# Altium PCB GPS_LoRa_Tracker.PcbDoc
Units mm, origin at the board's own origin, x right, y up, seen from the top; angles counter-clockwise.
Board outline 61.59 x 53.34 mm, 2 copper layers (Top Layer, Bottom Layer), stack 1.671 mm thick; 3 components, 4 nets, 35 pads, 0 vias.
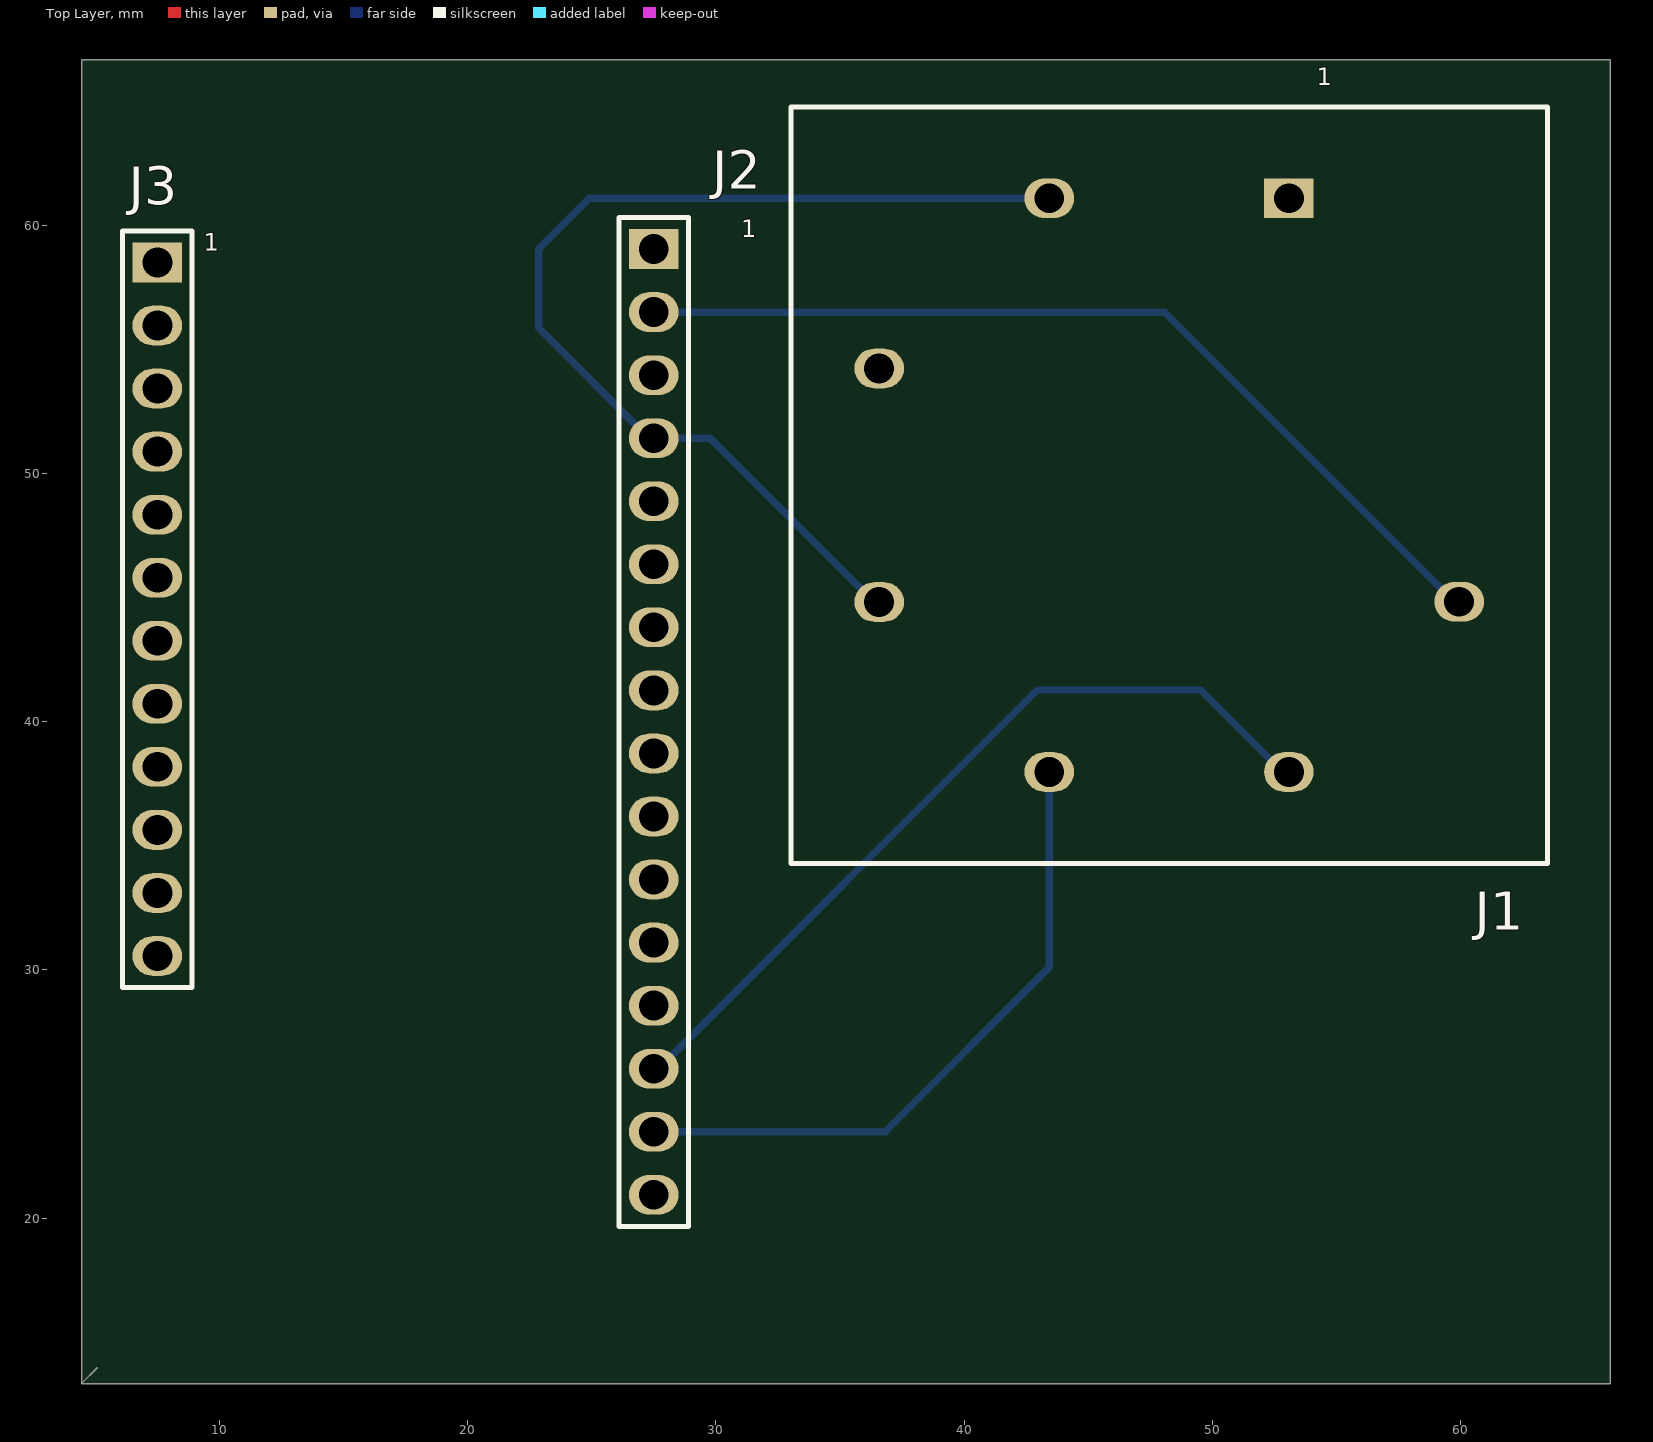
[diagram p0: Top Layer view]
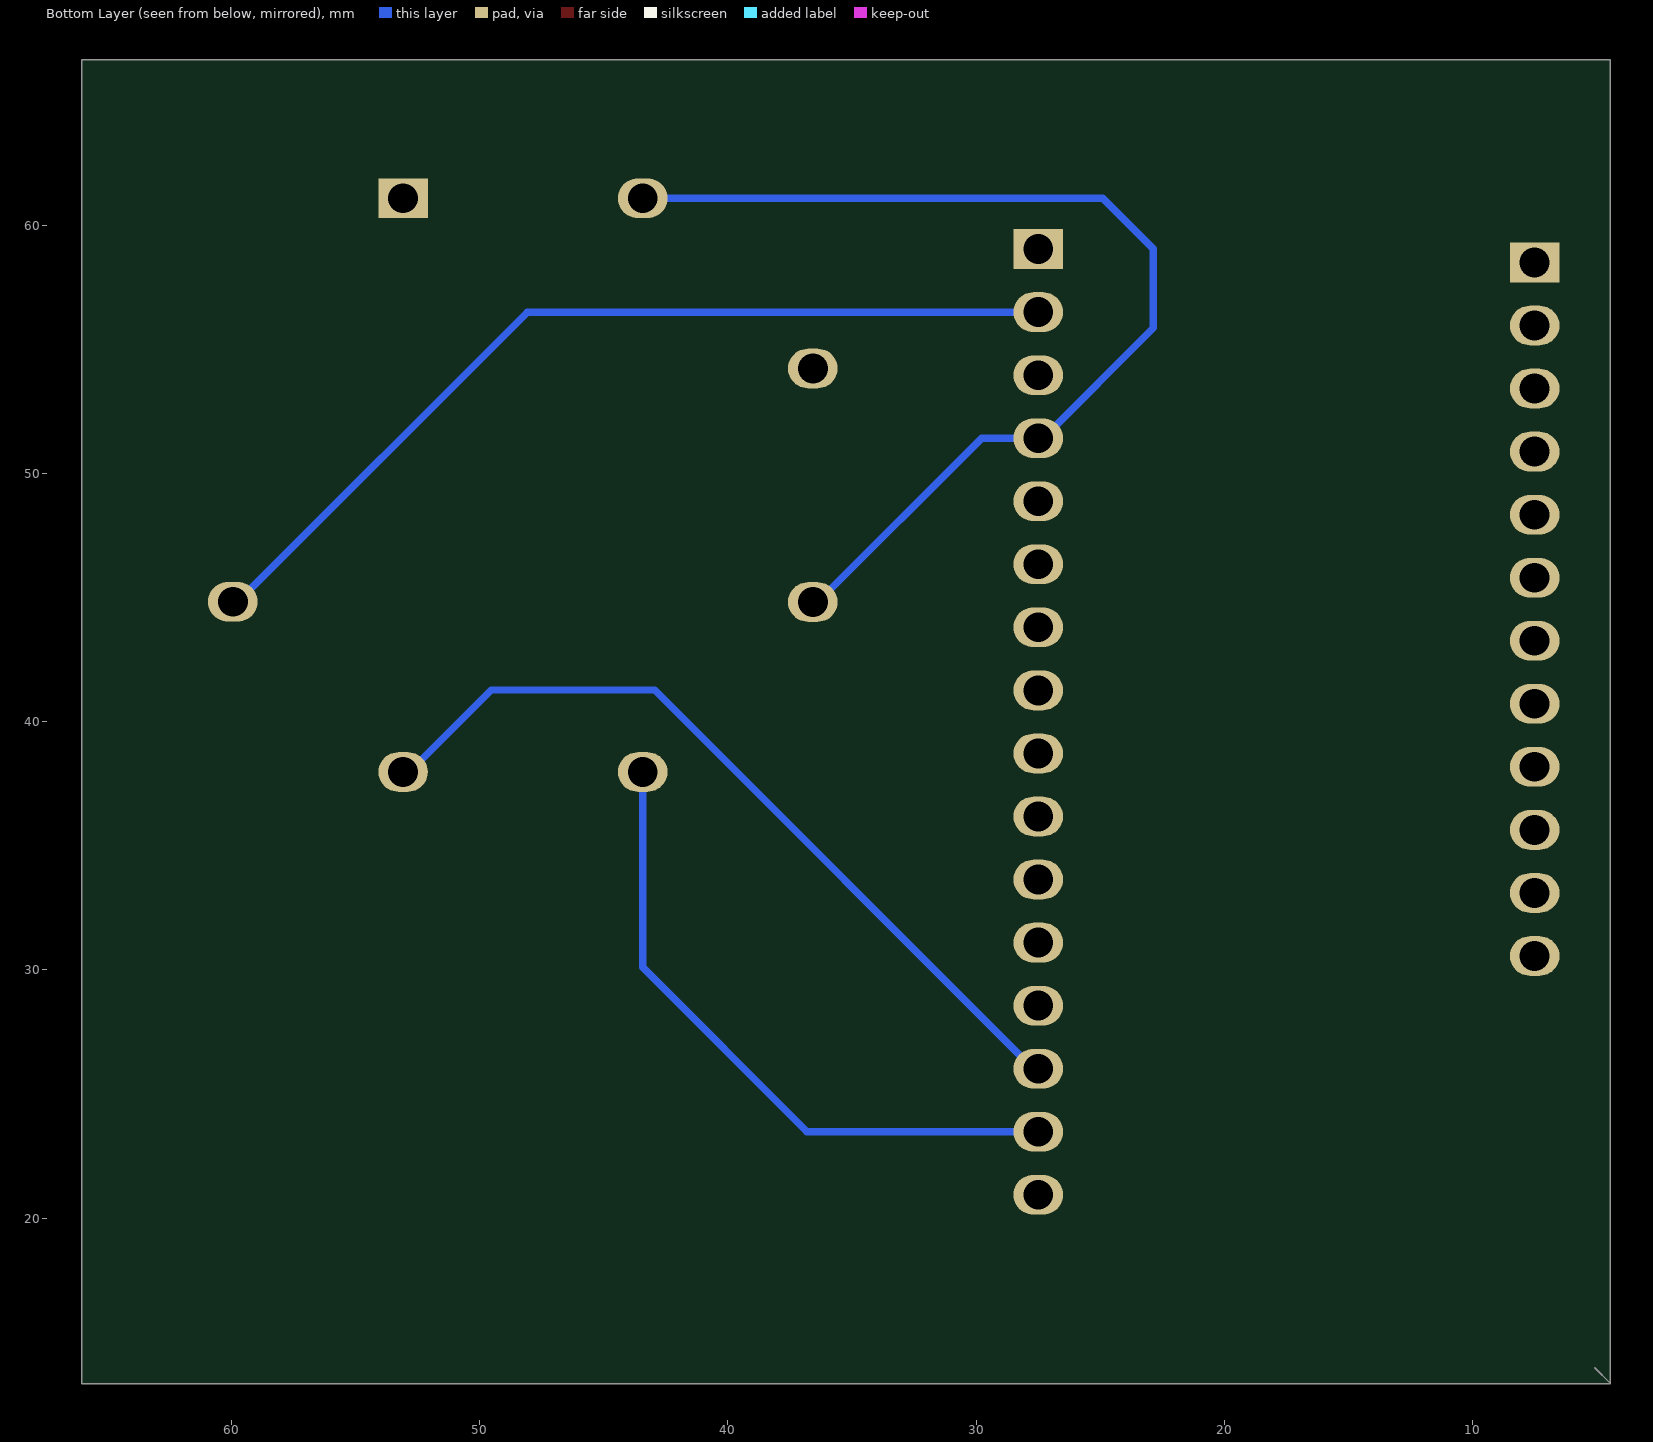
[diagram p1: Bottom Layer view, seen from below]
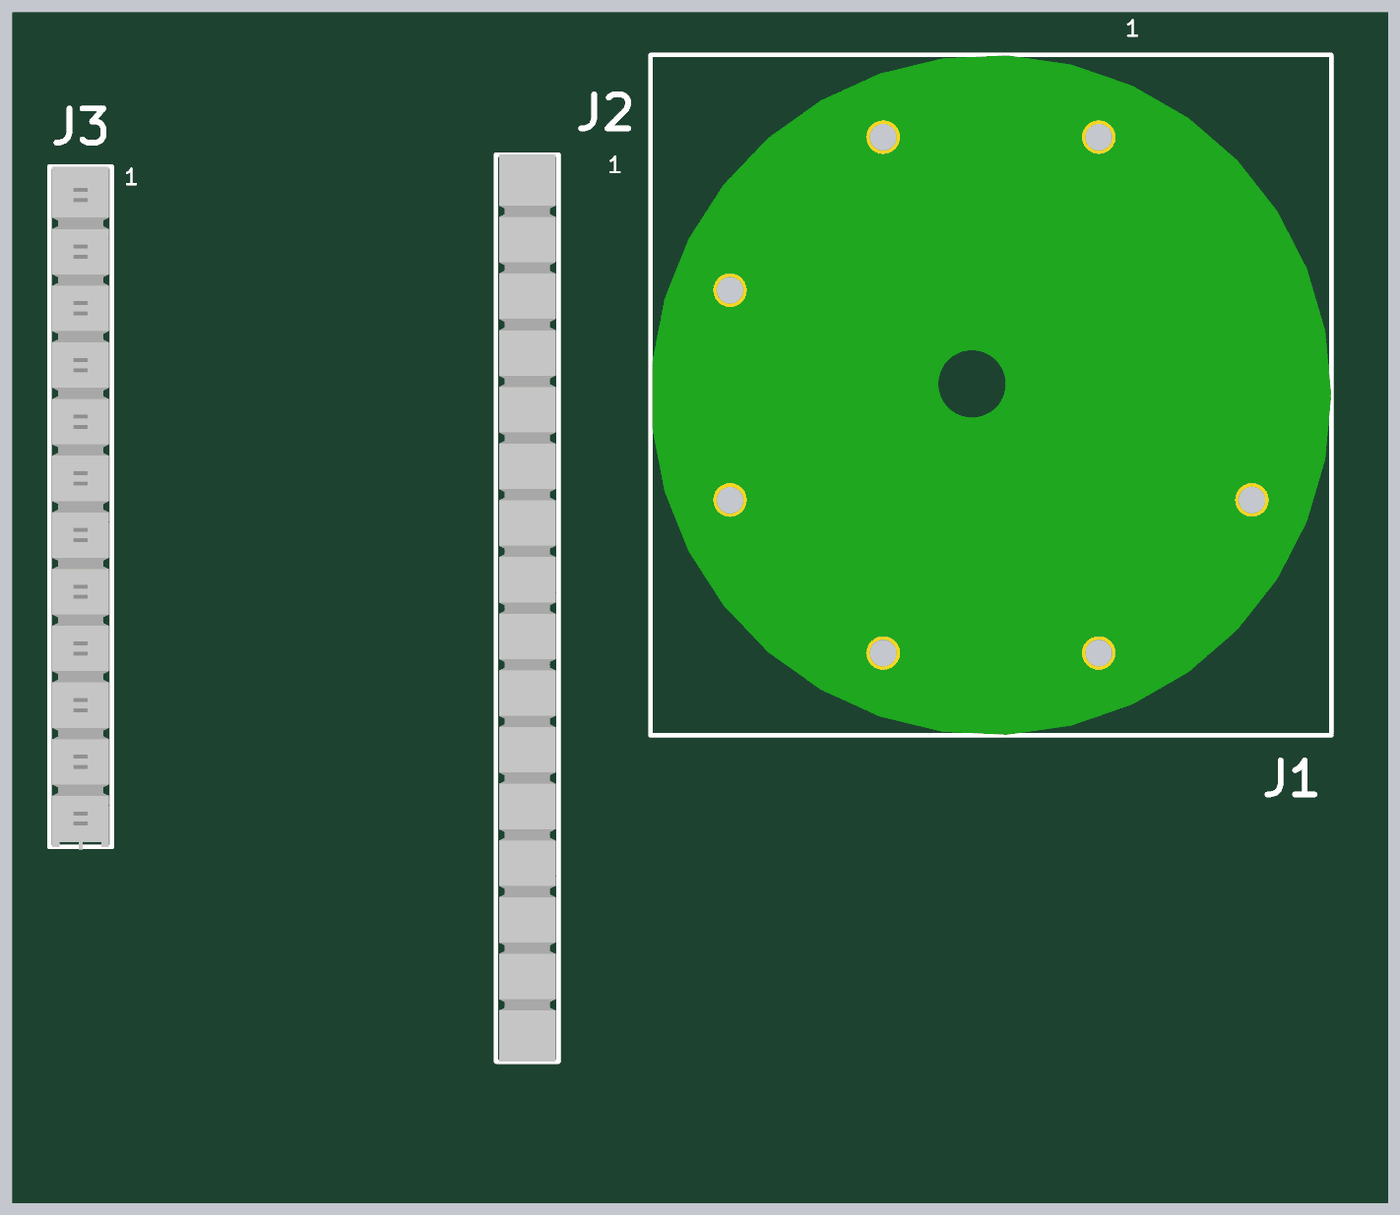
[diagram p2: 3D render of the assembled board from above, using the file's embedded part models]

## Layer stack, top to bottom
Top Solder: solder mask 0.0102, Solder Resist, Dk 3.5
Top Layer: signal copper 0.0356
Dielectric 1: dielectric 1.6, FR-4, Dk 4.8
Bottom Layer: signal copper 0.0356
Bottom Solder: solder mask 0.0102, Solder Resist, Dk 3.5

## Board outline
66.04,66.675 66.04,13.335 4.445,13.335 5.08,13.97 4.445,13.335 4.445,66.675

## Design rules (kind name [scope] priority, off if disabled: settings)
Clearance [OnLayer('Bottom Layer') vs OnLayer('Bottom Layer')] p1: gap=0.3 ignorepadtopadclearanceinfootprint=TRUE
ComponentClearance [All] p1: gap=0.254 collisioncheckmode=3 verticalgap=0 showdistances=FALSE
PolygonConnect [All] p1: connectstyle=Relief reliefconductorwidth=0.254 reliefentries=4 polygonreliefangle="90 Angle" airgapwidth=0.254
RoutingVias [All] p1: holewidth=0.711 width=1.27 viastyle="Through Hole" minholewidth=0.711 minwidth=1.27 maxholewidth=0.711 maxwidth=1.27
SolderMaskExpansion [All] p1: expansion=0.102 istentingtop=FALSE
Width [All] p1: maxlimit=1 minlimit=0.1 preferedwidth=0.3
29 further rules are at their usual default settings.

## Classes and differential pairs
component class GPS_LoRa_Tracker: J2 J3

## Components (designator, comment, footprint, x,y, rotation, side; value= is the part's Value field where it differs from the comment)
J1 "Flora_Header" "FLORA_HEADER - duplicate" 48.26,49.53 r0 top
J2 "1x16 Header" HDR1x16 27.5,39.99 r0 top locked
J3 "1x12 Header" HDR1X12 7.5,58.5 r0 top

## Footprints (in the part's own frame and the unit in brackets; to place one, negate y for a bottom-side part, rotate by r counter-clockwise, add the part's x,y. Pads: shape width x height; smd on the part's side, far side on the other; paste and mask are expansions set on the pad)
"FLORA_HEADER - duplicate" [mm]
  rect 2x1.6 hole 1.2: 1(4.826,11.557)
  oval 2x1.6 hole 1.2: 2(-4.826,11.557) 3(-11.684,4.699) 4(-11.684,-4.71) 5(-4.826,-11.557) 6(4.826,-11.557) 7(11.684,-4.699)
  silkscreen extent -15.24,-15.24 15.24,15.24, body extent -15.24,-15.23 15.24,15.24, height 0.01
HDR1X12 [mm]
  rect 2x1.6 hole 1.2: 1(0,0)
  oval 2x1.6 hole 1.2: 2(0,-2.54) 3(0,-5.08) 4(0,-7.62) 5(0,-10.16) 6(0,-12.7) 7(0,-15.24) 8(0,-17.78) 9(0,-20.32) 10(0,-22.86) 11(0,-25.4) 12(0,-27.94)
  silkscreen extent -1.4,-29.21 1.4,1.27, body extent -1.27,-29.34 1.27,1.27, height 5.09
HDR1x16 [mm]
  rect 2x1.6 hole 1.2: 1(0,19.05)
  oval 2x1.6 hole 1.2: 2(0,16.51) 3(0,13.97) 4(0,11.43) 5(0,8.89) 6(0,6.35) 7(0,3.81) 8(0,1.27) 9(0,-1.27) 10(0,-3.81) 11(0,-6.35) 12(0,-8.89) 13(0,-11.43) 14(0,-13.97) 15(0,-16.51) 16(0,-19.05)
  silkscreen extent -1.4,-20.32 1.4,20.32, body extent -1.27,-20.32 1.27,20.32, height 4.84

## Part data
J1: library part Flora_GPS_Header, "Flora GPS Header Connections"
J2: library part 0022272161, "KK 254 Wire-to-Board Header, Vertical, with Friction Lock, 16 Circuits, Tin (Sn) Plating", Color=Natural, Contact Resistance=10mR, Flammability Rating="UL94 V-0", Housing Color=White, Manufacturer=Molex, Max Operating Temperature=75°C, Min Operating Temperature=0°C, Package Quantity=2500, Supplier Part Number 1=WM2791-ND, Category="Headers and Wire Housings", ComponentLink1Description=https://datasheet.ciiva.com/716/022272051-sd-716503.pdf?src-supplier=Digi-Key, ComponentLink1URL=https://datasheet.ciiva.com/716/022272051-sd-716503.pdf?src-supplier=Digi-Key, ComponentLink2Description=https://datasheet.ciiva.com/3118/0022272161-pcb-headers-3118897.pdf?src-supplier=Avnet, ComponentLink2URL=https://datasheet.ciiva.com/3118/0022272161-pcb-headers-3118897.pdf?src-supplier=Avnet, ComponentLink3Description=https://datasheet.ciiva.com/26844/getdatasheetpartid-474068-26844027.pdf?src-supplier=Verical, ComponentLink3URL=https://datasheet.ciiva.com/26844/getdatasheetpartid-474068-26844027.pdf?src-supplier=Verical, Connector Type=Header, Contact Finish - Mating=TIN, Contact Material=Brass, Contact Mating Length=0.295inch, Contact Plating=Copper,Tin, Contact Shape=Square, Contact Type="Male Pin", Depth=5.8mm, Fastening Type=Friction, Gender=Male, Housing Material=Nylon, Insulation Color=Natural, Insulation Material=Nylon, Length=40.64mm, Manufacturer Part Number=0022272161, Mount="Through Hole", Number of Contacts=16, Number of Positions=16, Number of Rows=1, Orientation=Straight, Packaging=Bulk, Pitch=2.54mm, Pricing 1="1=1.53000, 10=1.30400, 100=1.07730, 1000=0.85050, 5000=0.75600 (USD)", RoHS=Yes, RoHS Compliant=Yes, Series="KK 6410", Stock 1=1658, Supplier 1=Digi-Key, Termination=Solder
J3: library part TSW-112-07-F-S, "Headers & Wire Housings Classic PCB Header Strips, 0.100 pitch", Color=Black, Manufacturer=Samtec, Max Current Rating=7.6A, Max Operating Temperature=125°C, Max Voltage Rating (AC)=550V, Min Operating Temperature=-55°C, Package Quantity=1, Supplier Part Number 1=SAM15955-ND, Category="Headers and Wire Housings", ComponentLink1Description=https://datasheet.ciiva.com/739/tsw-xxx-xx-xxx-x-xx-xxx-mkt-739996.pdf?src-supplier=Digi-Key, ComponentLink1URL=https://datasheet.ciiva.com/739/tsw-xxx-xx-xxx-x-xx-xxx-mkt-739996.pdf?src-supplier=Digi-Key, ComponentLink2Description=https://datasheet.ciiva.com/10314/htsw-th-10314423.pdf?src-supplier=Avnet, ComponentLink2URL=https://datasheet.ciiva.com/10314/htsw-th-10314423.pdf?src-supplier=Avnet, ComponentLink3Description=https://datasheet.ciiva.com/16707/htsw-th-16707931.pdf?src-supplier=Avnet+Europe, ComponentLink3URL=https://datasheet.ciiva.com/16707/htsw-th-16707931.pdf?src-supplier=Avnet+Europe, Connector Type="Male Pin", Contact Material=Bronze, Contact Mating Length=0.23inch, Contact Plating=Gold, Contact Type="Male Pin", Depth=2.54mm, Gender=Male, Housing Color=Black, Housing Material=Polyester, Length=30.48mm, Manufacturer Part Number=TSW-112-07-F-S, Mount="Through Hole", Number of Contacts=12, Number of Positions=12, Number of Rows=1, Orientation=Straight, Packaging=Rail/Tube, Pitch=2.54mm, Pricing 1="1=1.34000, 10=1.13200, 100=1.01640, 500=0.83160, 1000=0.73920, 5000=0.64680, 10000=0.61600 (USD)", Radiation Hardening=No, REACH SVHC="No SVHC", RoHS=Yes, RoHS Compliant=Yes, Series=TSW, Stock 1=68, Supplier 1=Digi-Key, Termination=Solder

## Nets (pads, with @x,y where several pads share a name; then routed paths per layer and width w, separated by ;. In a path a pad name is that pad's centre, name@x,y a point inside that pad or via, vN(x,y) a via of type N, cw(c..) or ccw(c..) an arc to the next point about the centre after c; other vN are vias at no path point)
3.3V: J1.7 J2.2 | length 37.3
  Bottom Layer w0.3: J2.2 48.075,56.5 59.744,44.831 J1.7
GND: J1.2 J1.4 J2.4 | length 42.9
  Bottom Layer w0.3: J1.4 36.376,44.82 29.776,51.42 J2.4 27.3,51.42 22.86,55.86 22.86,59.055 24.892,61.087 J1.2
NetJ1_5: J1.5 J2.15 | length 26.9
  Bottom Layer w0.3: J2.15 36.815,23.48 43.434,30.099 J1.5 J1.5@43.18,37.719
NetJ1_6: J1.6 J2.14 | length 33.3
  Bottom Layer w0.3: J2.14 27.7,26.02 42.955,41.275 49.53,41.275 52.832,37.973 J1.6
pads on no net: J1.1 J1.3 J2.1 J2.3 J2.5 J2.6 J2.7 J2.8 J2.9 J2.10 J2.11 J2.12 J2.13 J2.16 J3.1 J3.2 J3.3 J3.4 J3.5 J3.6 J3.7 J3.8 J3.9 J3.10 J3.11 J3.12

## Silkscreen, mask and mechanical layers (free items; w line width, h text height)
Outline:
  lines w0.2: 4.445,13.335 66.04,13.335 66.04,66.675 4.445,66.675 4.445,13.335

## Text inside footprints (layer, text, board x,y; h text height)
J1: Top Overlay "1" at 54.202,65.632 h0.7
J2: Top Overlay "1" at 31.029,59.521 h0.7
J3: Top Overlay "1" at 9.378,58.981 h0.7